# EAGLE board humidity-v2.3 panelized (EAGLE 5.11)
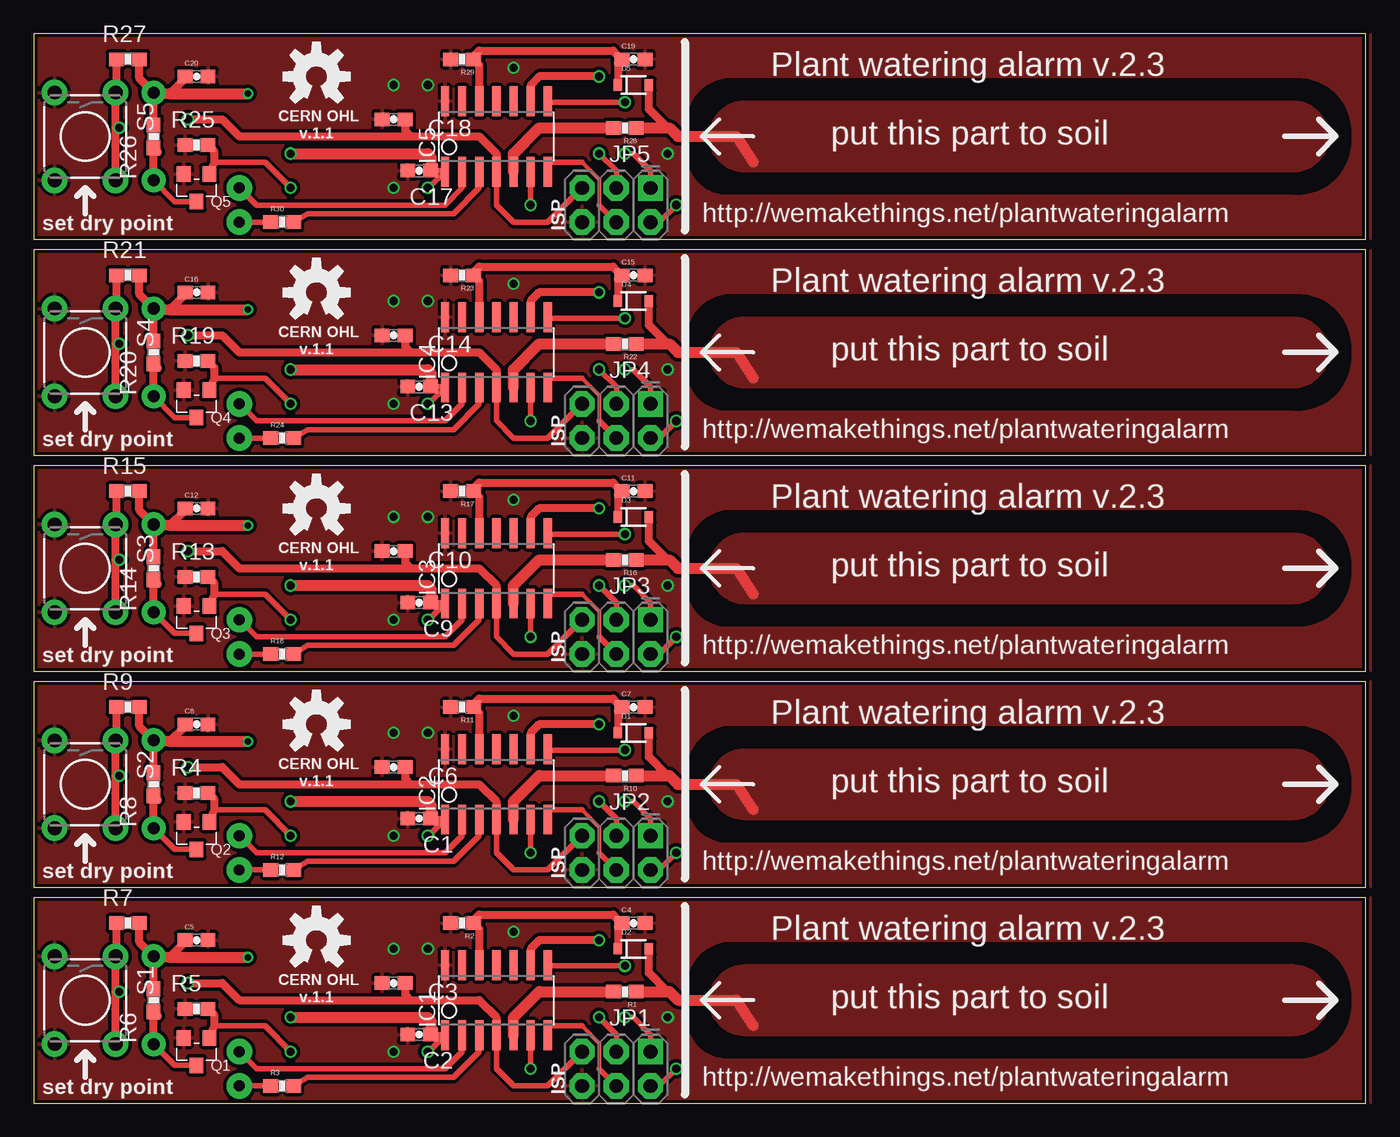
[diagram p0: board, top side]
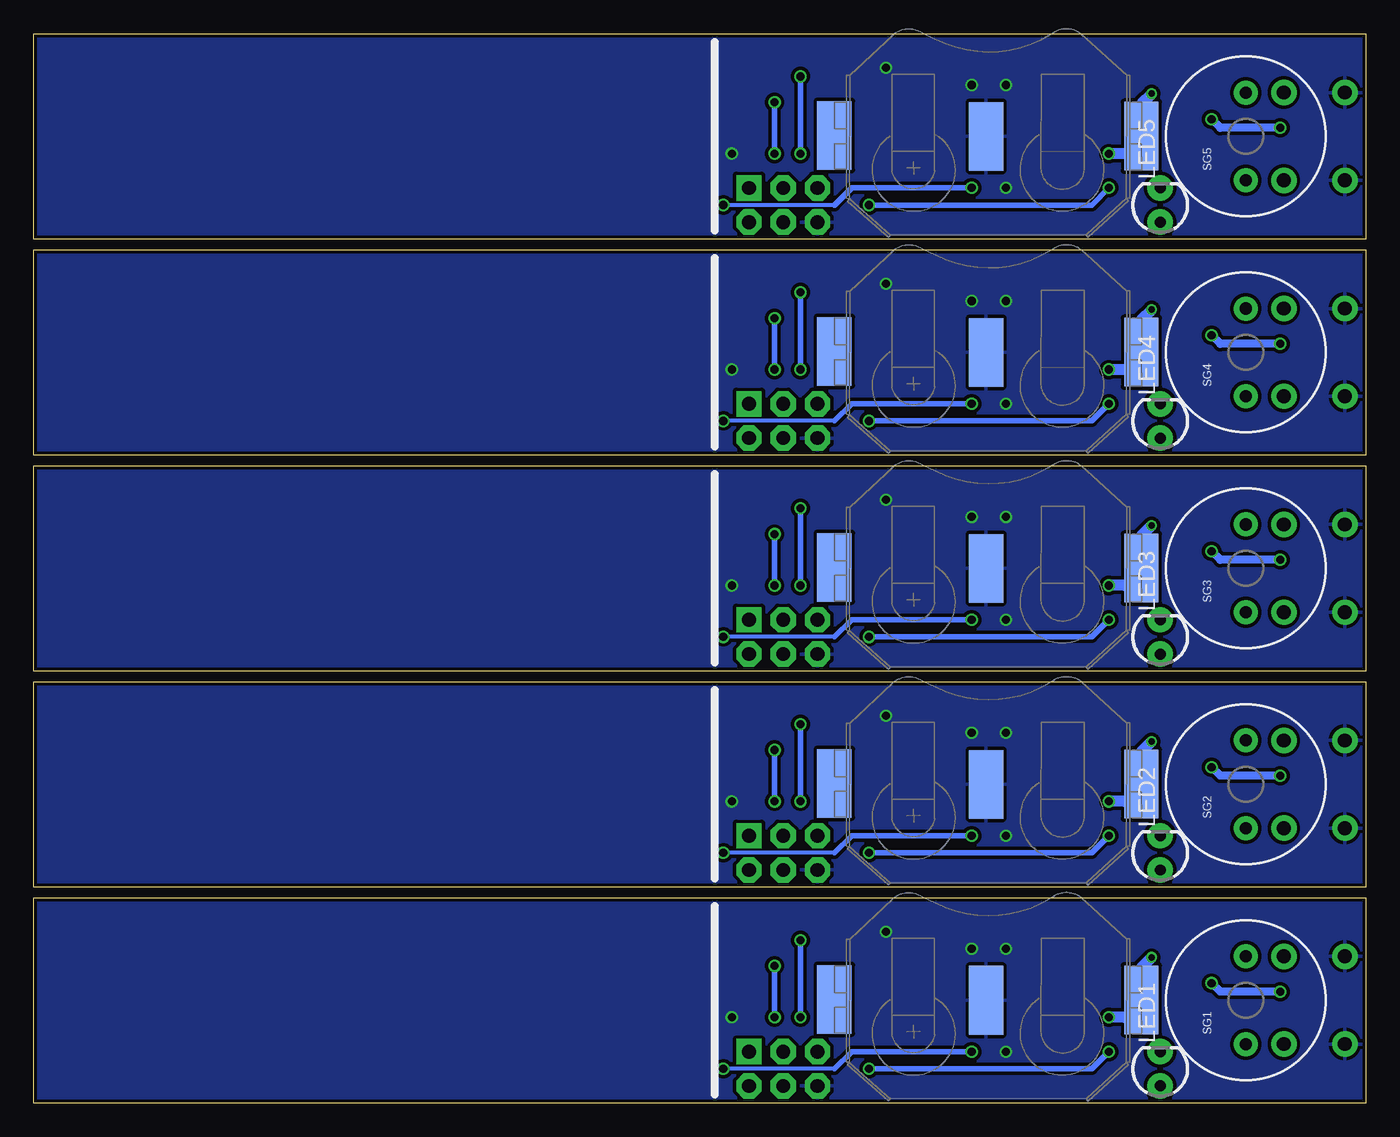
[diagram p1: board, bottom side, seen from below]

Size 98.73 x 79.23 mm. Coordinates in mm from the lower left corner, seen from the top.
Outline: 0,0 98.73,0 98.73,15.23 0,15.23 0,0
Outline: 0,16 98.73,16 98.73,31.23 0,31.23 0,16
Outline: 0,32 98.73,32 98.73,47.23 0,47.23 0,32
Outline: 0,48 98.73,48 98.73,63.23 0,63.23 0,48
Outline: 0,64 98.73,64 98.73,79.23 0,79.23 0,64
Copper layers (1*16): Top 0.035mm / dielectric 1.5mm / Bottom 0.035mm
Design rules "Fusion_eagle_rule_v1.1": minimum track width 6mil, minimum drill 12mil, track to track 6mil, track to pad 6mil, pad to pad 6mil, via to via 6mil, smd to smd 0mil, copper to edge 10mil, drill to drill 10mil, minimum pad ring 10mil, minimum via ring 6mil, stop-mask expansion 2mil, vias tented up to drill 100mil, thermal gap 10mil

## Footprints (pad centres in the part's own frame; a part is rotated, then mirrored left to right if it is on the bottom)
BAT-HLD-001 = smd 2.54 x 5.08: 1 -11.51,-0.02; 2 0,0; 3 11.25,-0.07
0603-CAP = smd 1.1 x 1: 1 -0.85,0; 2 0.85,0
SOD-323 = smd 0.63 x 0.83: 1 -1.15,0; 2 1.15,0
SOIC14 = smd 0.61 x 2.21: 1 -3.81,-2.603; 2 -2.54,-2.603; 3 -1.27,-2.603; 4 0,-2.603; 5 1.27,-2.603; 6 2.54,-2.603; 7 3.81,-2.603; 8 3.81,2.603; 9 2.54,2.603; 10 1.27,2.603; 11 0,2.603; 12 -1.27,2.603; 13 -2.54,2.603; 14 -3.81,2.603
2X3-NS = drill 1.016 pad 1.88 square: 1 -2.54,-1.27 | drill 1.016 pad 1.88 octagon: 2 -2.54,1.27; 3 0,-1.27; 4 0,1.27; 5 2.54,-1.27; 6 2.54,1.27
LED3MM = drill 0.813 pad 1.88 round: A -1.27,0; K 1.27,0
SOT23 = smd 1.016 x 1.143: 1 -0.95,-1.016; 2 0.95,-1.016; 3 0,1.016
0603-RES = smd 1.1 x 1: 1 -0.85,0; 2 0.85,0
TACTILE-PTH = drill 1.016 pad 1.88 round: 1 -3.251,2.261; 2 3.251,2.261; 3 -3.251,-2.261; 4 3.251,-2.261
BUZZER-12MM = drill 0.9 pad 1.778 round: + 3.25,0; - -3.25,0

## Placement (x,y rotation side)
B1  [BAT-HLD-001]  28.14,7.62 180 bottom
B2  [BAT-HLD-001]  28.14,23.62 180 bottom
B3  [BAT-HLD-001]  28.14,39.62 180 bottom
B4  [BAT-HLD-001]  28.14,55.62 180 bottom
B5  [BAT-HLD-001]  28.14,71.62 180 bottom
C1  100nF  [0603-CAP]  28.57,21.08 180 top
C2  100nF  [0603-CAP]  28.57,5.08 180 top
C3  100nF  [0603-CAP]  26.67,8.89 180 top
C4  1uF  [0603-CAP]  44.45,13.34 0 top
C5  1uF  [0603-CAP]  12.06,12.06 0 top
C6  100nF  [0603-CAP]  26.67,24.89 180 top
C7  1uF  [0603-CAP]  44.45,29.34 0 top
C8  1uF  [0603-CAP]  12.06,28.07 0 top
C9  100nF  [0603-CAP]  28.57,37.08 180 top
C10  100nF  [0603-CAP]  26.67,40.89 180 top
C11  1uF  [0603-CAP]  44.45,45.34 0 top
C12  1uF  [0603-CAP]  12.06,44.06 0 top
C13  100nF  [0603-CAP]  28.57,53.08 180 top
C14  100nF  [0603-CAP]  26.67,56.89 180 top
C15  1uF  [0603-CAP]  44.45,61.34 0 top
C16  1uF  [0603-CAP]  12.06,60.06 0 top
C17  100nF  [0603-CAP]  28.57,69.08 180 top
C18  100nF  [0603-CAP]  26.67,72.89 180 top
C19  1uF  [0603-CAP]  44.45,77.33 0 top
C20  1uF  [0603-CAP]  12.06,76.06 0 top
D1  DIODE-SCHOTTKY_  [SOD-323]  44.45,27.43 0 top
D2  DIODE-SCHOTTKY_  [SOD-323]  44.45,11.43 0 top
D3  DIODE-SCHOTTKY_  [SOD-323]  44.45,43.43 0 top
D4  DIODE-SCHOTTKY_  [SOD-323]  44.45,59.43 0 top
D5  DIODE-SCHOTTKY_  [SOD-323]  44.45,75.43 0 top
IC1  TINY24/44/84-SSU  [SOIC14]  34.29,7.62 0 top
IC2  TINY24/44/84-SSU  [SOIC14]  34.29,23.62 0 top
IC3  TINY24/44/84-SSU  [SOIC14]  34.29,39.62 0 top
IC4  TINY24/44/84-SSU  [SOIC14]  34.29,55.62 0 top
IC5  TINY24/44/84-SSU  [SOIC14]  34.29,71.62 0 top
JP1  AVR_SPI_PRG_6NS  [2X3-NS]  43.18,2.54 180 top
JP2  AVR_SPI_PRG_6NS  [2X3-NS]  43.18,18.54 180 top
JP3  AVR_SPI_PRG_6NS  [2X3-NS]  43.18,34.54 180 top
JP4  AVR_SPI_PRG_6NS  [2X3-NS]  43.18,50.54 180 top
JP5  AVR_SPI_PRG_6NS  [2X3-NS]  43.18,66.54 180 top
LED1  [LED3MM]  15.24,2.54 90 bottom
LED2  [LED3MM]  15.24,18.54 90 bottom
LED3  [LED3MM]  15.24,34.54 90 bottom
LED4  [LED3MM]  15.24,50.54 90 bottom
LED5  [LED3MM]  15.24,66.54 90 bottom
Q1  [SOT23]  12.06,3.81 180 top
Q2  [SOT23]  12.06,19.81 180 top
Q3  [SOT23]  12.06,35.81 180 top
Q4  [SOT23]  12.06,51.81 180 top
Q5  [SOT23]  12.06,67.81 180 top
R1  10K  [0603-RES]  43.81,8.26 180 top
R2  510K  [0603-RES]  31.75,13.34 180 top
R3  100R  [0603-RES]  18.41,1.27 0 top
R4  10K  [0603-RES]  12.06,22.98 0 top
R5  10K  [0603-RES]  12.06,6.99 0 top
R6  1K  [0603-RES]  8.89,7.62 90 top
R7  10K  [0603-RES]  6.99,13.34 0 top
R8  1K  [0603-RES]  8.89,23.62 90 top
R9  10K  [0603-RES]  6.99,29.34 0 top
R10  10K  [0603-RES]  43.81,24.25 180 top
R11  510K  [0603-RES]  31.75,29.34 180 top
R12  100R  [0603-RES]  18.41,17.27 0 top
R13  10K  [0603-RES]  12.06,38.98 0 top
R14  1K  [0603-RES]  8.89,39.62 90 top
R15  10K  [0603-RES]  6.99,45.34 0 top
R16  10K  [0603-RES]  43.81,40.26 180 top
R17  510K  [0603-RES]  31.75,45.34 180 top
R18  100R  [0603-RES]  18.41,33.27 0 top
R19  10K  [0603-RES]  12.06,54.98 0 top
R20  1K  [0603-RES]  8.89,55.62 90 top
R21  10K  [0603-RES]  6.99,61.34 0 top
R22  10K  [0603-RES]  43.81,56.26 180 top
R23  510K  [0603-RES]  31.75,61.34 180 top
R24  100R  [0603-RES]  18.41,49.27 0 top
R25  10K  [0603-RES]  12.06,70.98 0 top
R26  1K  [0603-RES]  8.89,71.62 90 top
R27  10K  [0603-RES]  6.99,77.33 0 top
R28  10K  [0603-RES]  43.81,72.25 180 top
R29  510K  [0603-RES]  31.75,77.33 180 top
R30  100R  [0603-RES]  18.41,65.27 0 top
S1  [TACTILE-PTH]  3.81,7.62 270 top
S2  [TACTILE-PTH]  3.81,23.62 270 top
S3  [TACTILE-PTH]  3.81,39.62 270 top
S4  [TACTILE-PTH]  3.81,55.62 270 top
S5  [TACTILE-PTH]  3.81,71.62 270 top
SG1  BUZZERPTH  [BUZZER-12MM]  8.89,7.62 90 bottom
SG2  BUZZERPTH  [BUZZER-12MM]  8.89,23.62 90 bottom
SG3  BUZZERPTH  [BUZZER-12MM]  8.89,39.62 90 bottom
SG4  BUZZERPTH  [BUZZER-12MM]  8.89,55.62 90 bottom
SG5  BUZZERPTH  [BUZZER-12MM]  8.89,71.62 90 bottom

## Library data of the parts
B1-B5 C1-C20 D1-D5 JP1-JP5 LED1-LED5 R1-R30 S1-S5 SG1-SG5 = SparkFun
IC1-IC5 = avr-5
Q1-Q5 = Seeed-Discrete

## Nets
BUZZER: IC1.6 Q1.1 R5.2
BUZZER1: IC2.6 Q2.1 R4.2
BUZZER2: IC3.6 Q3.1 R13.2
BUZZER3: IC4.6 Q4.1 R19.2
BUZZER4: IC5.6 Q5.1 R25.2
CAPACITANCE_V: C4.1 D2.1 IC1.12 R2.1
CAPACITANCE_V1: C7.1 D1.1 IC2.12 R11.1
CAPACITANCE_V2: C11.1 D3.1 IC3.12 R17.1
CAPACITANCE_V3: C15.1 D4.1 IC4.12 R23.1
CAPACITANCE_V4: C19.1 D5.1 IC5.12 R29.1
CLK_OUT: IC1.5 R1.2
CLK_OUT1: IC2.5 R10.2
CLK_OUT2: IC3.5 R16.2
CLK_OUT3: IC4.5 R22.2
CLK_OUT4: IC5.5 R28.2
GND: B1.2 C2.2 C3.2 C4.2 C5.2 IC1.14 JP1.6 Q1.2 R2.2 R5.1 S1.3 S1.4
GND1: B2.2 C1.2 C6.2 C7.2 C8.2 IC2.14 JP2.6 Q2.2 R4.1 R11.2 S2.3 S2.4
GND2: B3.2 C9.2 C10.2 C11.2 C12.2 IC3.14 JP3.6 Q3.2 R13.1 R17.2 S3.3 S3.4
GND3: B4.2 C13.2 C14.2 C15.2 C16.2 IC4.14 JP4.6 Q4.2 R19.1 R23.2 S4.3 S4.4
GND4: B5.2 C17.2 C18.2 C19.2 C20.2 IC5.14 JP5.6 Q5.2 R25.1 R29.2 S5.3 S5.4
LED_A: IC1.3 R3.2
LED_A1: IC2.3 R12.2
LED_A2: IC3.3 R18.2
LED_A3: IC4.3 R24.2
LED_A4: IC5.3 R30.2
LED_K: IC1.2 LED1.K
LED_K1: IC2.2 LED2.K
LED_K2: IC3.2 LED3.K
LED_K3: IC4.2 LED4.K
LED_K4: IC5.2 LED5.K
MISO: IC1.8 JP1.1
MISO1: IC2.8 JP2.1
MISO2: IC3.8 JP3.1
MISO3: IC4.8 JP4.1
MISO4: IC5.8 JP5.1
MOSI: IC1.7 JP1.4
MOSI1: IC2.7 JP2.4
MOSI2: IC3.7 JP3.4
MOSI3: IC4.7 JP4.4
MOSI4: IC5.7 JP5.4
N$1: Q1.3 R6.1 SG1.-
N$2: LED1.A R3.1
N$3: Q2.3 R8.1 SG2.-
N$4: LED2.A R12.1
N$5: Q3.3 R14.1 SG3.-
N$6: LED3.A R18.1
N$7: Q4.3 R20.1 SG4.-
N$8: LED4.A R24.1
N$9: Q5.3 R26.1 SG5.-
N$10: LED5.A R30.1
RESET: C3.1 IC1.4 JP1.5 R7.1 S1.1 S1.2
RESET1: C6.1 IC2.4 JP2.5 R9.1 S2.1 S2.2
RESET2: C10.1 IC3.4 JP3.5 R15.1 S3.1 S3.2
RESET3: C14.1 IC4.4 JP4.5 R21.1 S4.1 S4.2
RESET4: C18.1 IC5.4 JP5.5 R27.1 S5.1 S5.2
SCK: IC1.9 JP1.3
SCK1: IC2.9 JP2.3
SCK2: IC3.9 JP3.3
SCK3: IC4.9 JP4.3
SCK4: IC5.9 JP5.3
V_CAP: D2.2 R1.1
V_CAP1: D1.2 R10.1
V_CAP2: D3.2 R16.1
V_CAP3: D4.2 R22.1
V_CAP4: D5.2 R28.1
VCC: B1.1 C2.1 C5.1 IC1.1 JP1.2 R6.2 R7.2 SG1.+
VCC1: B2.1 C1.1 C8.1 IC2.1 JP2.2 R8.2 R9.2 SG2.+
VCC2: B3.1 C9.1 C12.1 IC3.1 JP3.2 R14.2 R15.2 SG3.+
VCC3: B4.1 C13.1 C16.1 IC4.1 JP4.2 R20.2 R21.2 SG4.+
VCC4: B5.1 C17.1 C20.1 IC5.1 JP5.2 R26.2 R27.2 SG5.+

## Tracks (layer width: path | path; a pad name or v marks a point on that pad's centre or on a via)
BUZZER  (via drill 0.6)
  Top 0.406: v36.83,2.54 IC1.6 | v19.05,3.81 17.14,5.71 13.4,5.71
  Top 0.61: Q1.1 13.4,5.71 13.4,6.5 R5.2
  Bottom 0.406: v36.83,2.54 20.32,2.54 v19.05,3.81
BUZZER1  (via drill 0.6)
  Top 0.406: v36.83,18.54 IC2.6 | v19.05,19.81 17.14,21.71 13.4,21.71
  Top 0.61: Q2.1 13.4,21.71 13.4,22.5 R4.2
  Bottom 0.406: v36.83,18.54 20.32,18.54 v19.05,19.81
BUZZER2  (via drill 0.6)
  Top 0.406: v36.83,34.54 IC3.6 | v19.05,35.81 17.14,37.72 13.4,37.72
  Top 0.61: Q3.1 13.4,37.72 13.4,38.5 R13.2
  Bottom 0.406: v36.83,34.54 20.32,34.54 v19.05,35.81
BUZZER3  (via drill 0.6)
  Top 0.406: v36.83,50.54 IC4.6 | v19.05,51.81 17.14,53.72 13.4,53.72
  Top 0.61: Q4.1 13.4,53.72 13.4,54.5 R19.2
  Bottom 0.406: v36.83,50.54 20.32,50.54 v19.05,51.81
BUZZER4  (via drill 0.6)
  Top 0.406: v36.83,66.54 IC5.6 | v19.05,67.81 17.14,69.72 13.4,69.72
  Top 0.61: Q5.1 13.4,69.72 13.4,70.5 R25.2
  Bottom 0.406: v36.83,66.54 20.32,66.54 v19.05,67.81
CAPACITANCE_V
  Top 0.406: 33.02,12.91 R2.1 32.6,13.55 | C4.1 43.3,13.06
  Top 0.61: 33.02,12.91 IC1.12 | C4.1 42.94,13.97 33.02,13.97 32.6,13.55 | 43.3,13.06 D2.1
CAPACITANCE_V1
  Top 0.406: 33.02,28.91 R11.1 32.6,29.55 | C7.1 43.3,29.06
  Top 0.61: 33.02,28.91 IC2.12 | C7.1 42.94,29.97 33.02,29.97 32.6,29.55 | 43.3,29.06 D1.1
CAPACITANCE_V2
  Top 0.406: 33.02,44.91 R17.1 32.6,45.55 | C11.1 43.3,45.06
  Top 0.61: 33.02,44.91 IC3.12 | C11.1 42.94,45.97 33.02,45.97 32.6,45.55 | 43.3,45.06 D3.1
CAPACITANCE_V3
  Top 0.406: 33.02,60.91 R23.1 32.6,61.55 | C15.1 43.3,61.06
  Top 0.61: 33.02,60.91 IC4.12 | C15.1 42.94,61.97 33.02,61.97 32.6,61.55 | 43.3,61.06 D4.1
CAPACITANCE_V4
  Top 0.406: 33.02,76.92 R29.1 32.6,77.55 | C19.1 43.3,77.06
  Top 0.61: 33.02,76.92 IC5.12 | C19.1 42.94,77.97 33.02,77.97 32.6,77.55 | 43.3,77.06 D5.1
CLK_OUT
  Top 0.813: IC1.5 35.56,6.35 37.47,8.26 R1.2
CLK_OUT1
  Top 0.813: IC2.5 35.56,22.35 37.47,24.25 R10.2
CLK_OUT2
  Top 0.813: IC3.5 35.56,38.35 37.47,40.26 R16.2
CLK_OUT3
  Top 0.813: IC4.5 35.56,54.35 37.47,56.26 R22.2
CLK_OUT4
  Top 0.813: IC5.5 35.56,70.35 37.47,72.25 R28.2
GND  (via drill 0.6)
  other vias: 26.67,11.43 29.21,11.43 26.67,3.81 46.99,6.35 35.56,12.7
  pour Top (isolate 0.254): 0,15.24 0,0 48.26,0 48.26,15.24
  pour Bottom (isolate 0.254): 0,15.24 99.06,15.24 99.06,0 0,0
  pour Top (isolate 0.254, no thermals): 48.26,15.24 99.06,15.24 99.06,0 46.99,0 46.99,6.35 48.26,6.35 arc90 51.44,3.17 93.34,3.17 arc90 97.79,6.99 97.79,8.26 arc90 93.34,12.06 52.07,12.06 arc90 48.26,8.89
GND1  (via drill 0.6)
  other vias: 26.67,27.43 29.21,27.43 26.67,19.81 46.99,22.35 35.56,28.7
  pour Top (isolate 0.254): 0,31.24 0,16 48.26,16 48.26,31.24
  pour Bottom (isolate 0.254): 0,31.24 99.06,31.24 99.06,16 0,16
  pour Top (isolate 0.254, no thermals): 48.26,31.24 99.06,31.24 99.06,16 46.99,16 46.99,22.35 48.26,22.35 arc90 51.44,19.18 93.34,19.18 arc90 97.79,22.98 97.79,24.25 arc90 93.34,28.07 52.07,28.07 arc90 48.26,24.89
GND2  (via drill 0.6)
  other vias: 26.67,43.43 29.21,43.43 26.67,35.81 46.99,38.35 35.56,44.7
  pour Top (isolate 0.254): 0,47.24 0,32 48.26,32 48.26,47.24
  pour Bottom (isolate 0.254): 0,47.24 99.06,47.24 99.06,32 0,32
  pour Top (isolate 0.254, no thermals): 48.26,47.24 99.06,47.24 99.06,32 46.99,32 46.99,38.35 48.26,38.35 arc90 51.44,35.17 93.34,35.17 arc90 97.79,38.98 97.79,40.26 arc90 93.34,44.06 52.07,44.06 arc90 48.26,40.89
GND3  (via drill 0.6)
  other vias: 26.67,59.43 29.21,59.43 26.67,51.81 46.99,54.35 35.56,60.7
  pour Top (isolate 0.254): 0,63.24 0,48 48.26,48 48.26,63.24
  pour Bottom (isolate 0.254): 0,63.24 99.06,63.24 99.06,48 0,48
  pour Top (isolate 0.254, no thermals): 48.26,63.24 99.06,63.24 99.06,48 46.99,48 46.99,54.35 48.26,54.35 arc90 51.44,51.17 93.34,51.17 arc90 97.79,54.98 97.79,56.26 arc90 93.34,60.06 52.07,60.06 arc90 48.26,56.89
GND4  (via drill 0.6)
  other vias: 26.67,75.43 29.21,75.43 26.67,67.81 46.99,70.35 35.56,76.7
  pour Top (isolate 0.254): 0,79.24 0,64 48.26,64 48.26,79.24
  pour Bottom (isolate 0.254): 0,79.24 99.06,79.24 99.06,64 0,64
  pour Top (isolate 0.254, no thermals): 48.26,79.24 99.06,79.24 99.06,64 46.99,64 46.99,70.35 48.26,70.35 arc90 51.44,67.17 93.34,67.17 arc90 97.79,70.98 97.79,72.25 arc90 93.34,76.06 52.07,76.06 arc90 48.26,72.89
LED_A
  Top 0.406: IC1.3 33.02,3.81 31.11,1.91 20.32,1.91 R3.2
LED_A1
  Top 0.406: IC2.3 33.02,19.81 31.11,17.91 20.32,17.91 R12.2
LED_A2
  Top 0.406: IC3.3 33.02,35.81 31.11,33.91 20.32,33.91 R18.2
LED_A3
  Top 0.406: IC4.3 33.02,51.81 31.11,49.91 20.32,49.91 R24.2
LED_A4
  Top 0.406: IC5.3 33.02,67.81 31.11,65.91 20.32,65.91 R30.2
LED_K
  Top 0.406: IC1.2 31.75,3.81 30.48,2.54 16.51,2.54 LED1.K
LED_K1
  Top 0.406: IC2.2 31.75,19.81 30.48,18.54 16.51,18.54 LED2.K
LED_K2
  Top 0.406: IC3.2 31.75,35.81 30.48,34.54 16.51,34.54 LED3.K
LED_K3
  Top 0.406: IC4.2 31.75,51.81 30.48,50.54 16.51,50.54 LED4.K
LED_K4
  Top 0.406: IC5.2 31.75,67.81 30.48,66.54 16.51,66.54 LED5.K
MISO  (via drill 0.6)
  Top 0.406: JP1.1 45.72,5.08 44.45,6.35 v43.81,6.35 | v43.81,10.16 38.16,10.16 IC1.8
  Bottom 0.406: v43.81,6.35 v43.81,10.16
MISO1  (via drill 0.6)
  Top 0.406: JP2.1 45.72,21.08 44.45,22.35 v43.81,22.35 | v43.81,26.16 38.16,26.16 IC2.8
  Bottom 0.406: v43.81,22.35 v43.81,26.16
MISO2  (via drill 0.6)
  Top 0.406: JP3.1 45.72,37.08 44.45,38.35 v43.81,38.35 | v43.81,42.16 38.16,42.16 IC3.8
  Bottom 0.406: v43.81,38.35 v43.81,42.16
MISO3  (via drill 0.6)
  Top 0.406: JP4.1 45.72,53.08 44.45,54.35 v43.81,54.35 | v43.81,58.16 38.16,58.16 IC4.8
  Bottom 0.406: v43.81,54.35 v43.81,58.16
MISO4  (via drill 0.6)
  Top 0.406: JP5.1 45.72,69.08 44.45,70.35 v43.81,70.35 | v43.81,74.16 38.16,74.16 IC5.8
  Bottom 0.406: v43.81,70.35 v43.81,74.16
MOSI
  Top 0.305: 41.91,2.54 41.91,4.45 40.64,5.71
  Top 0.406: 41.91,2.54 JP1.4 | 40.64,5.71 38.16,5.71 IC1.7
MOSI1
  Top 0.305: 41.91,18.54 41.91,20.45 40.64,21.71
  Top 0.406: 41.91,18.54 JP2.4 | 40.64,21.71 38.16,21.71 IC2.7
MOSI2
  Top 0.305: 41.91,34.54 41.91,36.45 40.64,37.72
  Top 0.406: 41.91,34.54 JP3.4 | 40.64,37.72 38.16,37.72 IC3.7
MOSI3
  Top 0.305: 41.91,50.54 41.91,52.45 40.64,53.72
  Top 0.406: 41.91,50.54 JP4.4 | 40.64,53.72 38.16,53.72 IC4.7
MOSI4
  Top 0.305: 41.91,66.54 41.91,68.44 40.64,69.72
  Top 0.406: 41.91,66.54 JP5.4 | 40.64,69.72 38.16,69.72 IC5.7
N$1
  Top 0.406: Q1.3 10.47,2.79 SG1.-
  Top 0.61: 9.19,6.47 R6.1 SG1.-
N$2
  Top 0.406: LED1.A R3.1
N$3
  Top 0.406: Q2.3 10.47,18.79 SG2.-
  Top 0.61: 9.19,22.47 R8.1 SG2.-
N$4
  Top 0.406: LED2.A R12.1
N$5
  Top 0.406: Q3.3 10.47,34.79 SG3.-
  Top 0.61: 9.19,38.47 R14.1 SG3.-
N$6
  Top 0.406: LED3.A R18.1
N$7
  Top 0.406: Q4.3 10.47,50.79 SG4.-
  Top 0.61: 9.19,54.47 R20.1 SG4.-
N$8
  Top 0.406: LED4.A R24.1
N$9
  Top 0.406: Q5.3 10.47,66.79 SG5.-
  Top 0.61: 9.19,70.47 R26.1 SG5.-
N$10
  Top 0.406: LED5.A R30.1
RESET  (via drill 0.6)
  Top 0.406: JP1.5 38.1,1.27 35.56,1.27 34.29,2.54 IC1.4 | S1.2 6.11,4.33 | S1.1 6.13,10.94
  Top 0.61: S1.1 S1.2 6.07,7.98 v6.35,8.26 | v11.43,8.89 13.97,8.89 15.24,7.62 27.94,7.62 | 27.94,7.62 33.02,7.62 34.29,6.35 IC1.4 | 6.13,10.94 R7.1 | C3.1 27.55,8.02 27.94,7.62
  Bottom 0.61: v6.35,8.26 10.79,8.26 v11.43,8.89
RESET1  (via drill 0.6)
  Top 0.406: JP2.5 38.1,17.27 35.56,17.27 34.29,18.54 IC2.4 | S2.2 6.11,20.33 | S2.1 6.13,26.94
  Top 0.61: S2.1 S2.2 6.07,23.98 v6.35,24.25 | v11.43,24.89 13.97,24.89 15.24,23.62 27.94,23.62 | 27.94,23.62 33.02,23.62 34.29,22.35 IC2.4 | 6.13,26.94 R9.1 | C6.1 27.55,24.02 27.94,23.62
  Bottom 0.61: v6.35,24.25 10.79,24.25 v11.43,24.89
RESET2  (via drill 0.6)
  Top 0.406: JP3.5 38.1,33.27 35.56,33.27 34.29,34.54 IC3.4 | S3.2 6.11,36.33 | S3.1 6.13,42.94
  Top 0.61: S3.1 S3.2 6.07,39.98 v6.35,40.26 | v11.43,40.89 13.97,40.89 15.24,39.62 27.94,39.62 | 27.94,39.62 33.02,39.62 34.29,38.35 IC3.4 | 6.13,42.94 R15.1 | C10.1 27.55,40.02 27.94,39.62
  Bottom 0.61: v6.35,40.26 10.79,40.26 v11.43,40.89
RESET3  (via drill 0.6)
  Top 0.406: JP4.5 38.1,49.27 35.56,49.27 34.29,50.54 IC4.4 | S4.2 6.11,52.33 | S4.1 6.13,58.94
  Top 0.61: S4.1 S4.2 6.07,55.98 v6.35,56.26 | v11.43,56.89 13.97,56.89 15.24,55.62 27.94,55.62 | 27.94,55.62 33.02,55.62 34.29,54.35 IC4.4 | 6.13,58.94 R21.1 | C14.1 27.55,56.02 27.94,55.62
  Bottom 0.61: v6.35,56.26 10.79,56.26 v11.43,56.89
RESET4  (via drill 0.6)
  Top 0.406: JP5.5 38.1,65.27 35.56,65.27 34.29,66.54 IC5.4 | S5.2 6.11,68.33 | S5.1 6.13,74.94
  Top 0.61: S5.1 S5.2 6.07,71.98 v6.35,72.25 | v11.43,72.89 13.97,72.89 15.24,71.62 27.94,71.62 | 27.94,71.62 33.02,71.62 34.29,70.35 IC5.4 | 6.13,74.94 R27.1 | C18.1 27.55,72.02 27.94,71.62
  Bottom 0.61: v6.35,72.25 10.79,72.25 v11.43,72.89
SCK  (via drill 0.6)
  Top 0.406: JP1.3 43.18,5.08 v41.91,6.35
  Top 0.61: v41.91,12.06 37.47,12.06 36.83,11.43 IC1.9
  Bottom 0.406: v41.91,6.35 v41.91,12.06
SCK1  (via drill 0.6)
  Top 0.406: JP2.3 43.18,21.08 v41.91,22.35
  Top 0.61: v41.91,28.07 37.47,28.07 36.83,27.43 IC2.9
  Bottom 0.406: v41.91,22.35 v41.91,28.07
SCK2  (via drill 0.6)
  Top 0.406: JP3.3 43.18,37.08 v41.91,38.35
  Top 0.61: v41.91,44.06 37.47,44.06 36.83,43.43 IC3.9
  Bottom 0.406: v41.91,38.35 v41.91,44.06
SCK3  (via drill 0.6)
  Top 0.406: JP4.3 43.18,53.08 v41.91,54.35
  Top 0.61: v41.91,60.06 37.47,60.06 36.83,59.43 IC4.9
  Bottom 0.406: v41.91,54.35 v41.91,60.06
SCK4  (via drill 0.6)
  Top 0.406: JP5.3 43.18,69.08 v41.91,70.35
  Top 0.61: v41.91,76.06 37.47,76.06 36.83,75.43 IC5.9
  Bottom 0.406: v41.91,70.35 v41.91,76.06
V_CAP
  Top 0.61: D2.2 45.6,9.64 46.99,8.26
  Top 0.813: 53.32,5.74 52.07,7.62 47.74,7.62 47.11,8.26 46.99,8.26 R1.1
  pour Top (no thermals): 50.16,7.62 arc-90 52.7,10.16 93.34,10.16 arc-90 95.89,7.62 arc-90 93.34,5.08 52.7,5.08 arc-90
V_CAP1
  Top 0.61: D1.2 45.6,25.64 46.99,24.25
  Top 0.813: 53.32,21.74 52.07,23.62 47.74,23.62 47.11,24.25 46.99,24.25 R10.1
  pour Top (no thermals): 50.16,23.62 arc-90 52.7,26.16 93.34,26.16 arc-90 95.89,23.62 arc-90 93.34,21.08 52.7,21.08 arc-90
V_CAP2
  Top 0.61: D3.2 45.6,41.65 46.99,40.26
  Top 0.813: 53.32,37.74 52.07,39.62 47.74,39.62 47.11,40.26 46.99,40.26 R16.1
  pour Top (no thermals): 50.16,39.62 arc-90 52.7,42.16 93.34,42.16 arc-90 95.89,39.62 arc-90 93.34,37.08 52.7,37.08 arc-90
V_CAP3
  Top 0.61: D4.2 45.6,57.65 46.99,56.26
  Top 0.813: 53.32,53.74 52.07,55.62 47.74,55.62 47.11,56.26 46.99,56.26 R22.1
  pour Top (no thermals): 50.16,55.62 arc-90 52.7,58.16 93.34,58.16 arc-90 95.89,55.62 arc-90 93.34,53.08 52.7,53.08 arc-90
V_CAP4
  Top 0.61: D5.2 45.6,73.64 46.99,72.25
  Top 0.813: 53.32,69.74 52.07,71.62 47.74,71.62 47.11,72.25 46.99,72.25 R28.1
  pour Top (no thermals): 50.16,71.62 arc-90 52.7,74.16 93.34,74.16 arc-90 95.89,71.62 arc-90 93.34,69.08 52.7,69.08 arc-90
VCC  (via drill 0.5, 0.6)
  Top 0.406: R6.2 9.19,8.77 | JP1.2 46.35,1.27 v47.62,2.54 | v29.21,3.81 29.27,3.81 IC1.1 30.42,5.08 C2.1 | SG1.+ 8.96,10.79 | 11.19,11.9 C5.1
  Top 0.61: R6.2 SG1.+ 7.83,11.93 R7.2 | 10.09,10.79 11.19,11.9
  Top 0.813: v15.88,10.79 10.09,10.79 SG1.+ | C2.1 29.45,6.11 29.21,6.35 v19.05,6.35
  Bottom 0.305: 39.37,2.54 v47.62,2.54
  Bottom 0.406: 39.37,2.54 38.1,3.81 v29.21,3.81 | B1.1 17.92,6.35
  Bottom 0.61: 16.63,10.04 B1.1
  Bottom 0.813: v15.88,10.79 16.63,10.04 | 17.92,6.35 v19.05,6.35
VCC1  (via drill 0.5, 0.6)
  Top 0.406: R8.2 9.19,24.77 | JP2.2 46.35,17.27 v47.62,18.54 | v29.21,19.81 29.27,19.81 IC2.1 30.42,21.08 C1.1 | SG2.+ 8.96,26.8 | 11.19,27.9 C8.1
  Top 0.61: R8.2 SG2.+ 7.83,27.93 R9.2 | 10.09,26.8 11.19,27.9
  Top 0.813: v15.88,26.8 10.09,26.8 SG2.+ | C1.1 29.45,22.11 29.21,22.35 v19.05,22.35
  Bottom 0.305: 39.37,18.54 v47.62,18.54
  Bottom 0.406: 39.37,18.54 38.1,19.81 v29.21,19.81 | B2.1 17.92,22.35
  Bottom 0.61: 16.63,26.04 B2.1
  Bottom 0.813: v15.88,26.8 16.63,26.04 | 17.92,22.35 v19.05,22.35
VCC2  (via drill 0.5, 0.6)
  Top 0.406: R14.2 9.19,40.77 | JP3.2 46.35,33.27 v47.62,34.54 | v29.21,35.81 29.27,35.81 IC3.1 30.42,37.08 C9.1 | SG3.+ 8.96,42.8 | 11.19,43.9 C12.1
  Top 0.61: R14.2 SG3.+ 7.83,43.92 R15.2 | 10.09,42.8 11.19,43.9
  Top 0.813: v15.88,42.8 10.09,42.8 SG3.+ | C9.1 29.45,38.11 29.21,38.35 v19.05,38.35
  Bottom 0.305: 39.37,34.54 v47.62,34.54
  Bottom 0.406: 39.37,34.54 38.1,35.81 v29.21,35.81 | B3.1 17.92,38.35
  Bottom 0.61: 16.63,42.04 B3.1
  Bottom 0.813: v15.88,42.8 16.63,42.04 | 17.92,38.35 v19.05,38.35
VCC3  (via drill 0.5, 0.6)
  Top 0.406: R20.2 9.19,56.77 | JP4.2 46.35,49.27 v47.62,50.54 | v29.21,51.81 29.27,51.81 IC4.1 30.42,53.08 C13.1 | SG4.+ 8.96,58.8 | 11.19,59.9 C16.1
  Top 0.61: R20.2 SG4.+ 7.83,59.92 R21.2 | 10.09,58.8 11.19,59.9
  Top 0.813: v15.88,58.8 10.09,58.8 SG4.+ | C13.1 29.45,54.11 29.21,54.35 v19.05,54.35
  Bottom 0.305: 39.37,50.54 v47.62,50.54
  Bottom 0.406: 39.37,50.54 38.1,51.81 v29.21,51.81 | B4.1 17.92,54.35
  Bottom 0.61: 16.63,58.04 B4.1
  Bottom 0.813: v15.88,58.8 16.63,58.04 | 17.92,54.35 v19.05,54.35
VCC4  (via drill 0.5, 0.6)
  Top 0.406: R26.2 9.19,72.77 | JP5.2 46.35,65.27 v47.62,66.54 | v29.21,67.81 29.27,67.81 IC5.1 30.42,69.08 C17.1 | SG5.+ 8.96,74.8 | 11.19,75.9 C20.1
  Top 0.61: R26.2 SG5.+ 7.83,75.92 R27.2 | 10.09,74.8 11.19,75.9
  Top 0.813: v15.88,74.8 10.09,74.8 SG5.+ | C17.1 29.45,70.11 29.21,70.35 v19.05,70.35
  Bottom 0.305: 39.37,66.54 v47.62,66.54
  Bottom 0.406: 39.37,66.54 38.1,67.81 v29.21,67.81 | B5.1 17.92,70.35
  Bottom 0.61: 16.63,74.04 B5.1
  Bottom 0.813: v15.88,74.8 16.63,74.04 | 17.92,70.35 v19.05,70.35

## Text on the board
_tsilk: Plant watering alarm v.2.3 | CERN OHL | v.1.1 | put this part to soil | set dry point | ISP | http://wemakethings.net/plantwateringalarm | Plant watering alarm v.2.3 | CERN OHL | v.1.1 | put this part to soil | set dry point | ISP | http://wemakethings.net/plantwateringalarm | Plant watering alarm v.2.3 | CERN OHL | v.1.1 | put this part to soil | set dry point | ISP | http://wemakethings.net/plantwateringalarm | Plant watering alarm v.2.3 | CERN OHL | v.1.1 | put this part to soil | set dry point | ISP | http://wemakethings.net/plantwateringalarm | Plant watering alarm v.2.3 | CERN OHL | v.1.1 | put this part to soil | set dry point | ISP | http://wemakethings.net/plantwateringalarm